# EAGLE board strum2 (EAGLE 6.6.0)
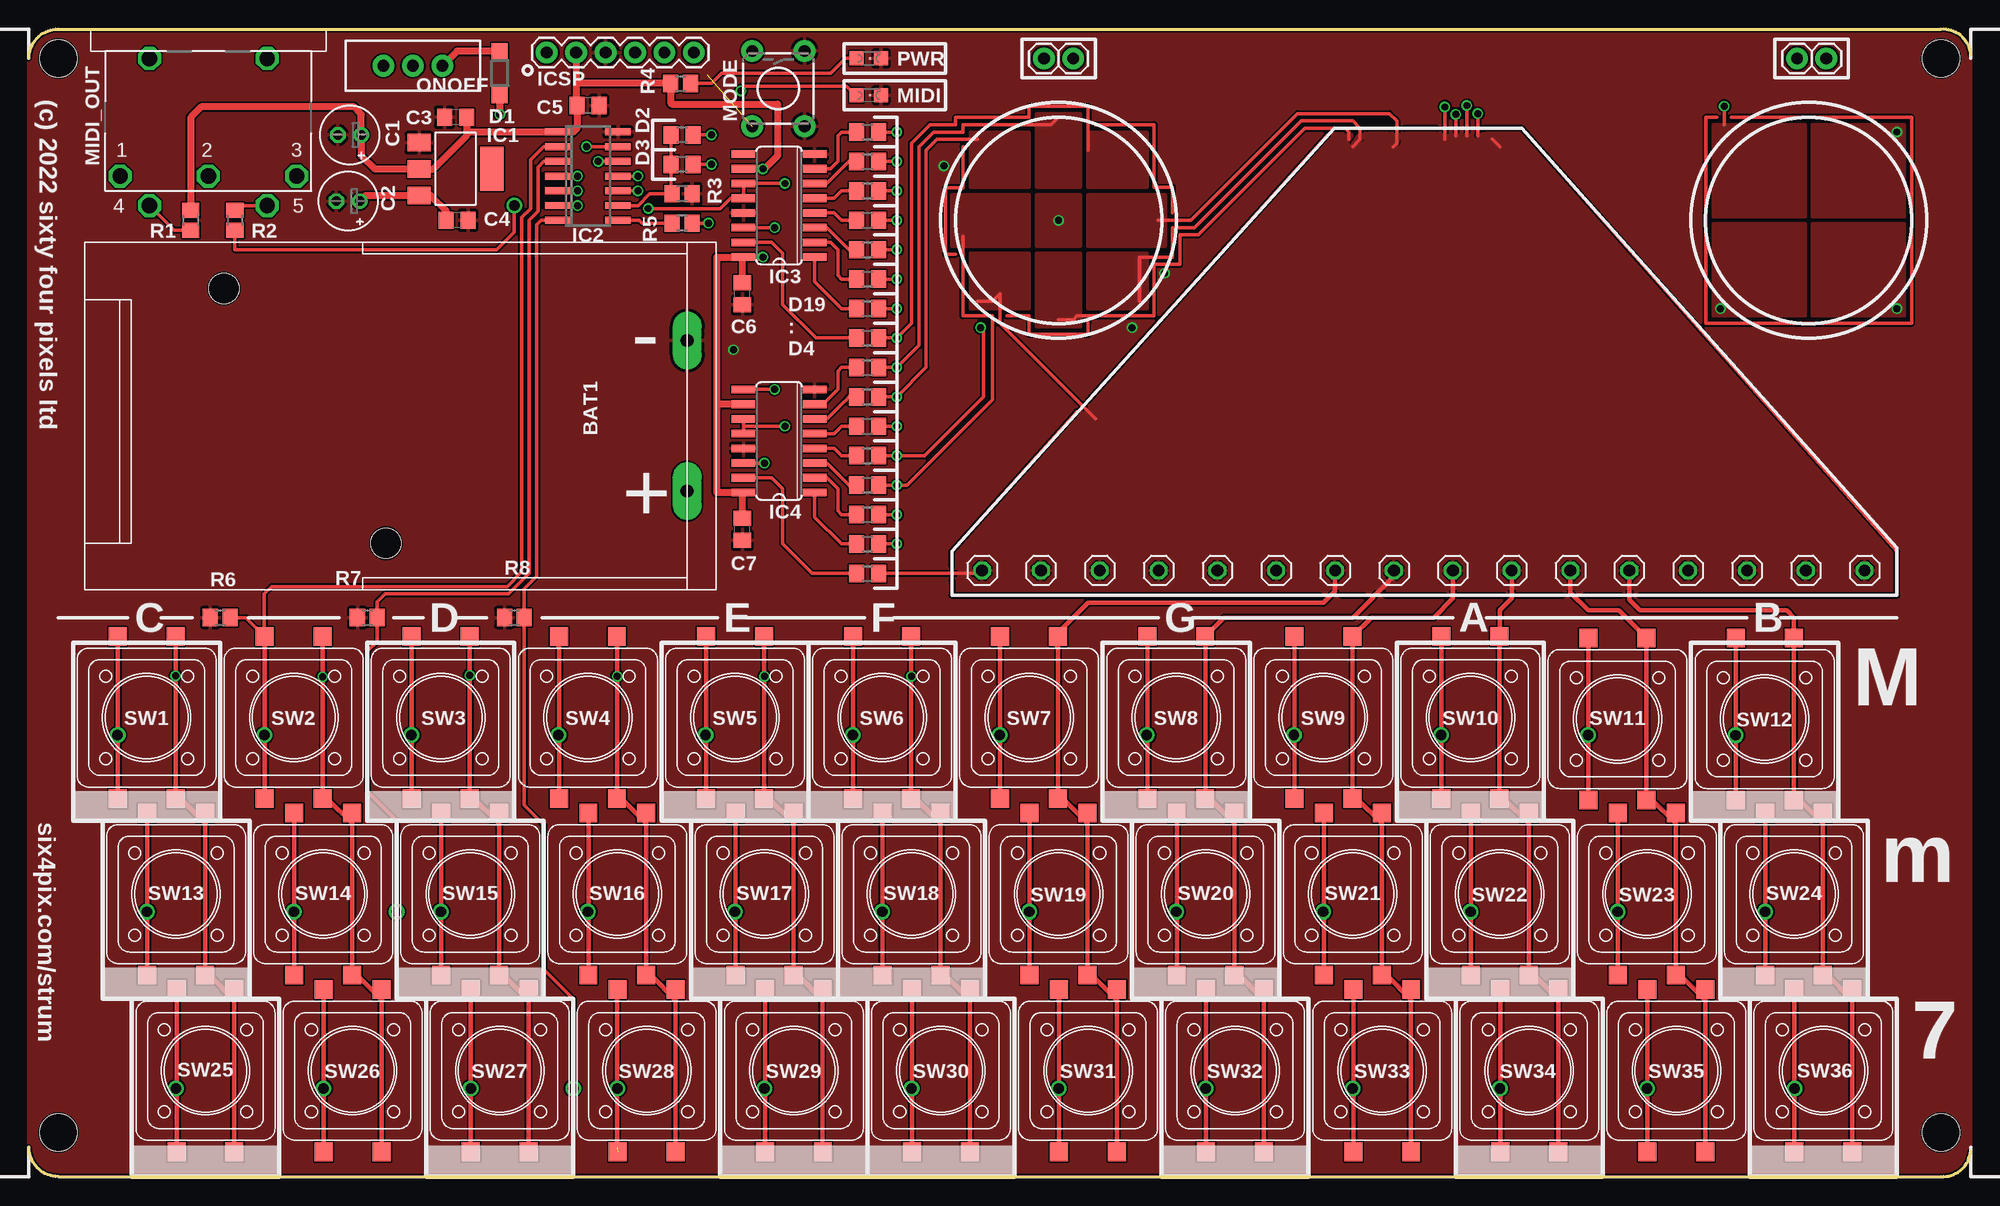
[diagram p0: board, top side]
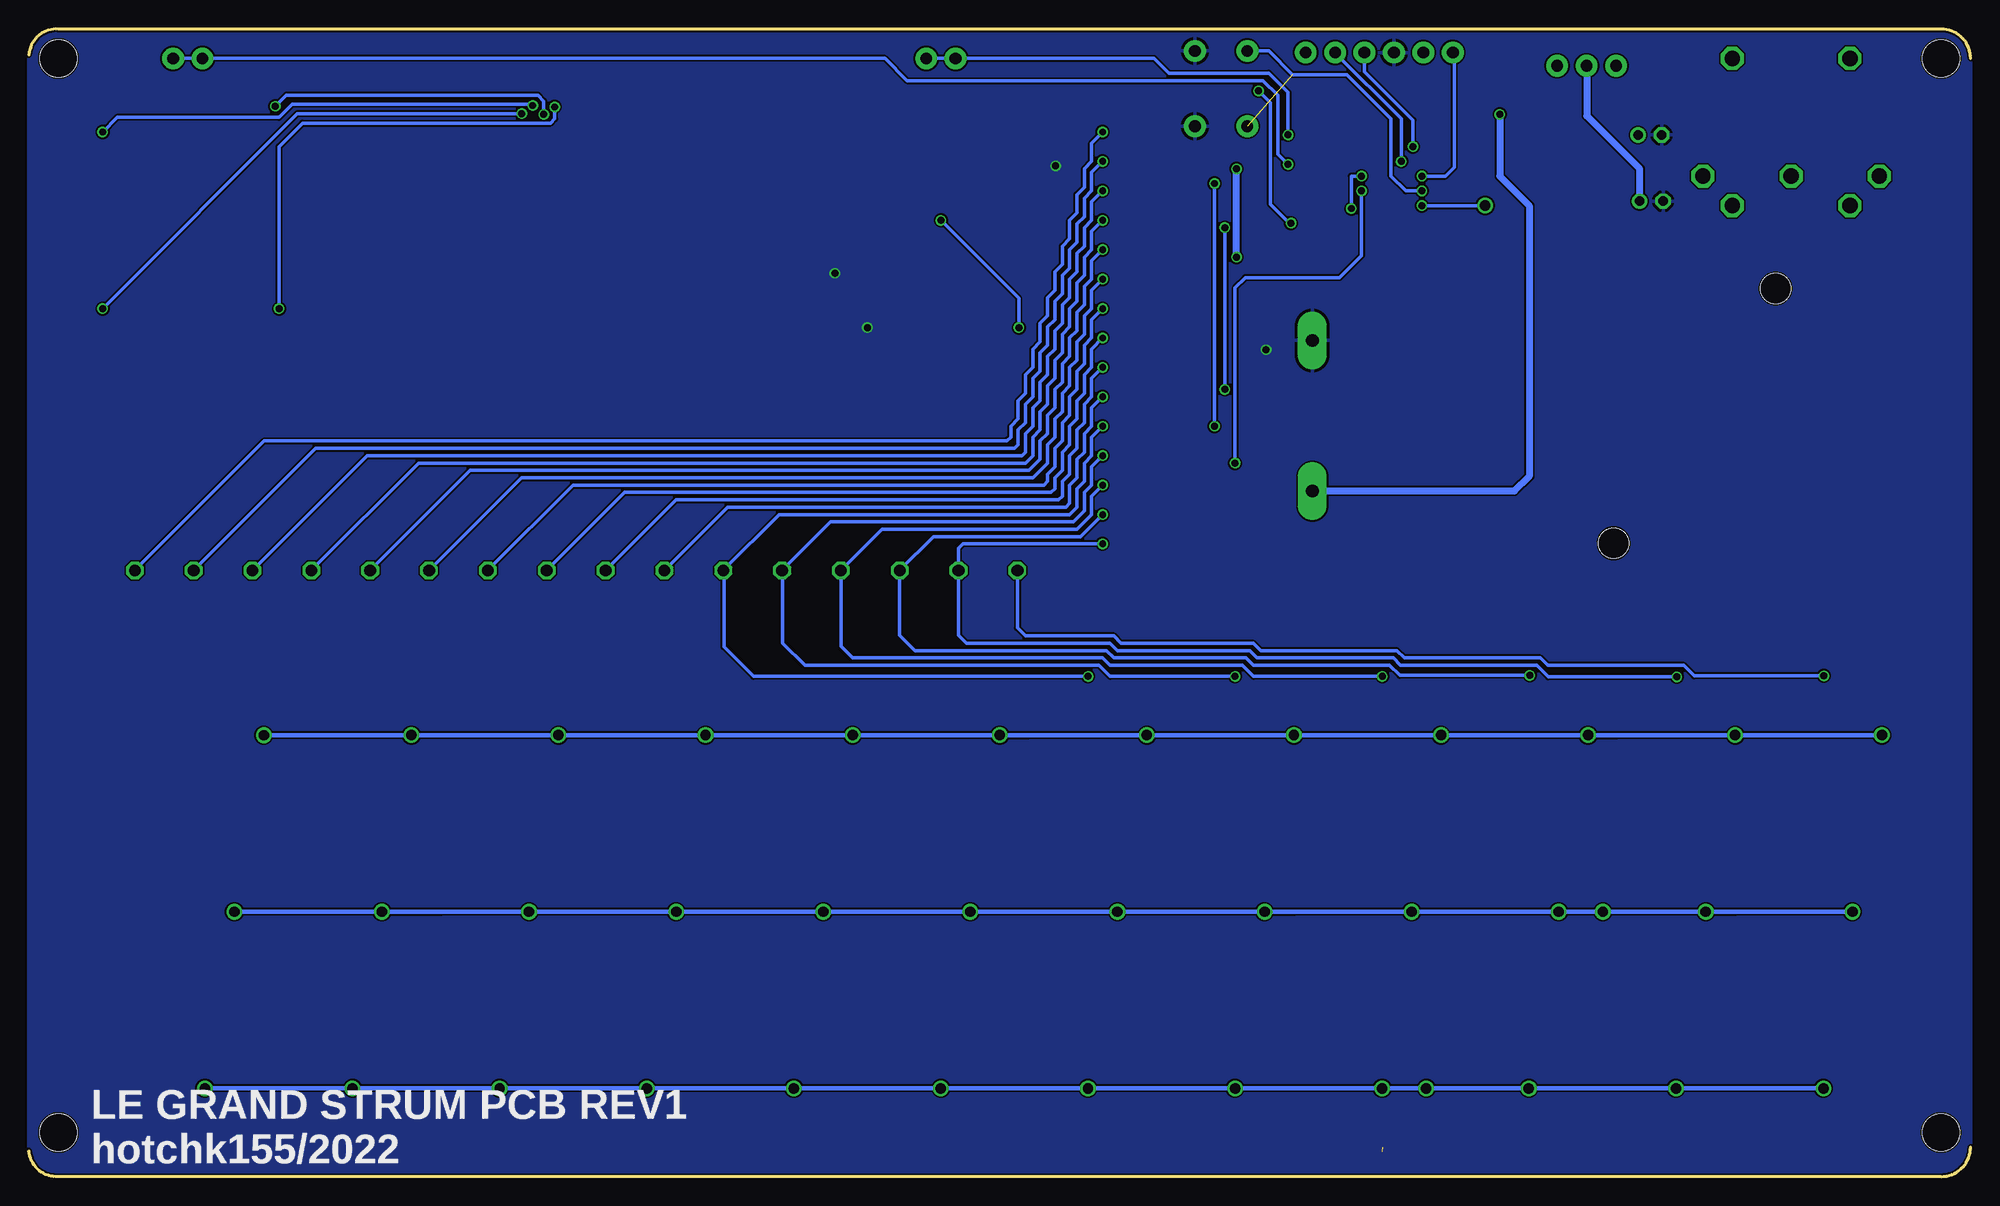
[diagram p1: board, bottom side, seen from below]

Size 167.64 x 99.07 mm. Coordinates in mm from the lower left corner, seen from the top.
Outline: 167.64,2.23 arc-90 165.1,0 2.54,0 arc-90 0,2.54
Outline: 0,96.52 arc-90 2.54,99.06 165.1,99.06 arc-90 167.64,96.84
Copper layers (1*16): Top 0.035mm / dielectric 1.5mm / Bottom 0.035mm
Design rules "hackvana": minimum track width 6mil, minimum drill 0.3mm, track to track 6mil, track to pad 9mil, pad to pad 6mil, via to via 6mil, smd to smd 0mil, copper to edge 6mil, drill to drill 6mil, minimum pad ring 10mil, minimum via ring 6mil, stop-mask expansion 2mil, vias tented up to drill 100mil, thermal gap 10mil
Holes 3.2 mm at 2.54,3.81 2.54,96.52 165.1,96.52 165.1,3.81
Holes 2.54 mm at -6.46,94 173.54,94 -6.46,4 173.54,4

## Footprints (pad centres in the part's own frame; a part is rotated, then mirrored left to right if it is on the bottom)
1X01 = drill 1.016 octagon: 1 0,0
PP3_BATTERBOX2 = drill 1.1 pad 2.5 long: 0V 52,21.5; 9V 52,8.5 | hole 2.6: 12,26; 26,4
E2-5 = drill 0.813 pad 1.27: + -1.016,0 | drill 0.813 pad 1.27 octagon: - 1.016,0
C0805 = smd 1.3 x 1.5: 1 -0.95,0; 2 0.95,0
SOD123 = smd 1.4 x 1.4: A 1.9,0; C -1.9,0
D0805 = smd 1.3 x 1.5: A -0.95,0; K 0.95,0
SOT223 = smd 1.499 x 2.007: 1 -2.261,-3.15; 2 0.025,-3.15; 3 2.311,-3.15 | smd 3.81 x 2.007: 4 0,3.15
SO14 = smd 0.6 x 2.2: 1 -3.81,-2.6; 2 -2.54,-2.6; 3 -1.27,-2.6; 4 0,-2.6; 5 1.27,-2.6; 6 2.54,-2.6; 7 3.81,-2.6; 8 3.81,2.6; 9 2.54,2.6; 10 1.27,2.6; 11 0,2.6; 12 -1.27,2.6; 13 -2.54,2.6; 14 -3.81,2.6
SO16 = smd 0.66 x 2.032: 1 -4.445,-3.073; 2 -3.175,-3.073; 3 -1.905,-3.073; 4 -0.635,-3.073; 5 0.635,-3.073; 6 1.905,-3.073; 7 3.175,-3.073; 8 4.445,-3.073; 9 4.445,3.073; 10 3.175,3.073; 11 1.905,3.073; 12 0.635,3.073; 13 -0.635,3.073; 14 -1.905,3.073; 15 -3.175,3.073; 16 -4.445,3.073
1X06 = drill 1.016 pad 1.88: 1 0,0; 2 2.54,0; 3 5.08,0; 4 7.62,0; 5 10.16,0; 6 12.7,0
CHIPLED_0805 = smd 1.2 x 1.2: A 0,-1.05; C 0,1.05
TRUCONN90 = drill 1.321 octagon: 1 7.62,5.08; 2 0,5.08; 3 -7.62,5.08; 4 5.08,7.62; 5 -5.08,7.62; NC -5.08,-5.08; NC@ 5.08,-5.08
TACTILE-PTH = drill 1.016 pad 1.88: 1 -3.251,2.261; 2 3.251,2.261; 3 -3.251,-2.261; 4 3.251,-2.261
SWITCH-SPDT = drill 1.016 pad 1.88: 1 0,2.54; 2 0,0; 3 0,-2.54
R0805 = smd 1.3 x 1.5: 1 -0.85,0; 2 0.85,0
1X01' = drill 1.016 pad 1.88: 1 0,0
12MMTACT_SMT = smd 1.6 x 1.55: A1 -7,2.5; A2 7,2.5; B1 -7,-2.5; B2 7,-2.5

## Placement (x,y rotation side)
1  [1X01]  82.3,52.33 0 top
2  [1X01]  87.38,52.33 0 top
3  [1X01]  92.46,52.33 0 top
4  [1X01]  97.54,52.33 0 top
5  [1X01]  102.62,52.33 0 top
6  [1X01]  107.7,52.33 0 top
7  [1X01]  112.78,52.33 0 top
8  [1X01]  117.86,52.33 0 top
9  [1X01]  122.94,52.33 0 top
10  [1X01]  128.02,52.33 0 top
11  [1X01]  133.1,52.33 0 top
12  [1X01]  138.18,52.33 0 top
13  [1X01]  143.26,52.33 0 top
14  [1X01]  148.34,52.33 0 top
15  [1X01]  153.42,52.33 0 top
16  [1X01]  158.5,52.33 0 top
BAT1  [PP3_BATTERBOX2]  4.83,50.68 0 top
C1  [E2-5]  27.69,89.92 180 top
C2  [E2-5]  27.56,84.21 180 top
C3  [C0805]  36.83,91.44 180 top
C4  [C0805]  36.96,82.55 180 top
C5  [C0805]  48.26,92.46 180 top
C6  [C0805]  61.59,76.2 90 top
C7  [C0805]  61.59,55.88 90 top
D1  MBR0520LT  [SOD123]  40.64,95.25 270 top
D2  [D0805]  56.39,89.92 180 top
D3  [D0805]  56.39,87.38 180 top
D4  [D0805]  72.39,52.07 0 top
D5  [D0805]  72.39,54.61 0 top
D6  [D0805]  72.39,57.15 0 top
D7  [D0805]  72.39,59.69 0 top
D8  [D0805]  72.39,62.23 0 top
D9  [D0805]  72.39,64.77 0 top
D10  [D0805]  72.39,67.31 0 top
D11  [D0805]  72.39,69.85 0 top
D12  [D0805]  72.39,72.39 0 top
D13  [D0805]  72.39,74.93 0 top
D14  [D0805]  72.39,77.47 0 top
D15  [D0805]  72.39,80.01 0 top
D16  [D0805]  72.39,82.55 0 top
D17  [D0805]  72.39,85.09 0 top
D18  [D0805]  72.39,87.63 0 top
D19  [D0805]  72.39,90.17 0 top
IC1  REG1117  [SOT223]  36.83,87 270 top
IC2  PIC16F1825SO14  [SO14]  48.26,86.37 270 top
IC3  74HC595D  [SO16]  64.77,83.82 90 top
IC4  74HC595D  [SO16]  64.77,63.5 90 top
ICSP  [1X06]  44.7,97.03 0 top
MIDI  [CHIPLED_0805]  72.52,93.35 270 top
MIDI_OUT  DIN5PIN"  [TRUCONN90]  15.49,91.44 180 top
MODE  [TACTILE-PTH]  64.71,93.92 270 top
ONOFF  [SWITCH-SPDT]  33.15,95.89 270 top
PWR  [CHIPLED_0805]  72.52,96.52 270 top
R1  220r  [R0805]  13.97,82.55 270 top
R2  220r  [R0805]  17.78,82.55 270 top
R3  10k  [R0805]  56.39,84.84 180 top
R4  1k  [R0805]  56.26,94.37 0 top
R5  1k  [R0805]  56.39,82.3 180 top
R6  10k  [R0805]  16.51,48.26 0 top
R7  10k  [R0805]  29.21,48.26 0 top
R8  10k  [R0805]  41.91,48.26 0 top
STYLUS  M01PTH  [1X01']  152.65,96.52 0 top
STYLUS1  M01PTH  [1X01']  155.19,96.52 0 top
STYLUS2  M01PTH  [1X01']  90.17,96.52 0 top
STYLUS3  M01PTH  [1X01']  87.63,96.52 0 top
SW1  12MMTACT_SMT  [12MMTACT_SMT]  10.16,39.63 90 top
SW2  12MMTACT_SMT  [12MMTACT_SMT]  22.86,39.63 90 top
SW3  12MMTACT_SMT  [12MMTACT_SMT]  35.56,39.63 90 top
SW4  12MMTACT_SMT  [12MMTACT_SMT]  48.26,39.63 90 top
SW5  12MMTACT_SMT  [12MMTACT_SMT]  60.96,39.63 90 top
SW6  12MMTACT_SMT  [12MMTACT_SMT]  73.66,39.63 90 top
SW7  12MMTACT_SMT  [12MMTACT_SMT]  86.36,39.63 90 top
SW8  12MMTACT_SMT  [12MMTACT_SMT]  99.06,39.63 90 top
SW9  12MMTACT_SMT  [12MMTACT_SMT]  111.76,39.63 90 top
SW10  12MMTACT_SMT  [12MMTACT_SMT]  124.46,39.63 90 top
SW11  12MMTACT_SMT  [12MMTACT_SMT]  137.16,39.5 90 top
SW12  12MMTACT_SMT  [12MMTACT_SMT]  149.86,39.5 90 top
SW13  12MMTACT_SMT  [12MMTACT_SMT]  12.7,24.39 90 top
SW14  12MMTACT_SMT  [12MMTACT_SMT]  25.4,24.39 90 top
SW15  12MMTACT_SMT  [12MMTACT_SMT]  38.1,24.39 90 top
SW16  12MMTACT_SMT  [12MMTACT_SMT]  50.8,24.39 90 top
SW17  12MMTACT_SMT  [12MMTACT_SMT]  63.5,24.39 90 top
SW18  12MMTACT_SMT  [12MMTACT_SMT]  76.2,24.39 90 top
SW19  12MMTACT_SMT  [12MMTACT_SMT]  88.9,24.39 90 top
SW20  12MMTACT_SMT  [12MMTACT_SMT]  101.6,24.39 90 top
SW21  12MMTACT_SMT  [12MMTACT_SMT]  114.3,24.39 90 top
SW22  12MMTACT_SMT  [12MMTACT_SMT]  127,24.39 90 top
SW23  12MMTACT_SMT  [12MMTACT_SMT]  139.7,24.39 90 top
SW24  12MMTACT_SMT  [12MMTACT_SMT]  152.4,24.39 90 top
SW25  12MMTACT_SMT  [12MMTACT_SMT]  15.24,9.15 90 top
SW26  12MMTACT_SMT  [12MMTACT_SMT]  27.94,9.15 90 top
SW27  12MMTACT_SMT  [12MMTACT_SMT]  40.64,9.15 90 top
SW28  12MMTACT_SMT  [12MMTACT_SMT]  53.34,9.15 90 top
SW29  12MMTACT_SMT  [12MMTACT_SMT]  66.04,9.15 90 top
SW30  12MMTACT_SMT  [12MMTACT_SMT]  78.74,9.15 90 top
SW31  12MMTACT_SMT  [12MMTACT_SMT]  91.44,9.15 90 top
SW32  12MMTACT_SMT  [12MMTACT_SMT]  104.14,9.15 90 top
SW33  12MMTACT_SMT  [12MMTACT_SMT]  116.84,9.15 90 top
SW34  12MMTACT_SMT  [12MMTACT_SMT]  129.54,9.15 90 top
SW35  12MMTACT_SMT  [12MMTACT_SMT]  142.24,9.15 90 top
SW36  12MMTACT_SMT  [12MMTACT_SMT]  154.94,9.15 90 top

## Library data of the parts
1-16 = pinhead
BAT1 IC2 MIDI_OUT = jasons_stuff
C1-C7 = rcl
D1 = diode
D2-D19 SW1-SW36 = jason_eagle6
IC1 = burr-brown; MPN: REG1117; OC_FARNELL: 1097566; OC_NEWARK: 14P6981
IC3 IC4 = 74xx-eu
ICSP MODE ONOFF STYLUS STYLUS1-STYLUS3 = SparkFun
MIDI PWR = led
R1-R8 = resistor

## Nets
CARRY: IC3.14 IC4.9
GND: BAT1.0V C1.- C2.- C3.2 C4.1 C5.1 C6.1 C7.1 IC1.1 IC2.14 IC3.8 IC3.13 IC4.8 IC4.13 ICSP.3 MIDI.C MODE.1 MODE.2 PWR.C R3.1 R6.1 R7.1 R8.1
LINE1: 1.1 D4.K SW1.B1 SW1.B2 SW13.B1 SW13.B2 SW25.B1 SW25.B2
LINE2: 2.1 D5.K SW2.B1 SW2.B2 SW14.B1 SW14.B2 SW26.B1 SW26.B2
LINE3: 3.1 D6.K SW3.B1 SW3.B2 SW15.B1 SW15.B2 SW27.B1 SW27.B2
LINE4: 4.1 D7.K SW4.B1 SW4.B2 SW16.B1 SW16.B2 SW28.B1 SW28.B2
LINE5: 5.1 D8.K SW5.B1 SW5.B2 SW17.B1 SW17.B2 SW29.B1 SW29.B2
LINE6: 6.1 D9.K SW6.B1 SW6.B2 SW18.B1 SW18.B2 SW30.B1 SW30.B2
LINE7: 7.1 D10.K SW7.B1 SW7.B2 SW19.B1 SW19.B2 SW31.B1 SW31.B2
LINE8: 8.1 D11.K SW8.B1 SW8.B2 SW20.B1 SW20.B2 SW32.B1 SW32.B2
LINE9: 9.1 D12.K SW9.B1 SW9.B2 SW21.B1 SW21.B2 SW33.B1 SW33.B2
LINE10: 10.1 D13.K SW10.B1 SW10.B2 SW22.B1 SW22.B2 SW34.B1 SW34.B2
LINE11: 11.1 D14.K SW11.B1 SW11.B2 SW23.B1 SW23.B2 SW35.B1 SW35.B2
LINE12: 12.1 D15.K SW12.B1 SW12.B2 SW24.B1 SW24.B2 SW36.B1 SW36.B2
LINE13: 13.1 D16.K
LINE14: 14.1 D17.K
LINE15: 15.1 D18.K
LINE16: 16.1 D19.K
N$1: PWR.A R4.2
N$2: BAT1.9V D1.A
N$3: D1.C ONOFF.1
N$5: D4.A IC4.15
N$6: D5.A IC4.1
N$7: D6.A IC4.2
N$8: D7.A IC4.3
N$9: D8.A IC4.4
N$10: D9.A IC4.5
N$11: D10.A IC4.6
N$12: MIDI.A R5.1
N$13: D11.A IC4.7
N$14: D12.A IC3.15
N$15: D13.A IC3.1
N$16: D14.A IC3.2
N$17: D15.A IC3.3
N$18: D16.A IC3.4
N$19: D17.A IC3.5
N$20: D18.A IC3.6
N$21: D19.A IC3.7
N$24: D2.A STYLUS2.1 STYLUS3.1
N$25: D3.A STYLUS1.1 STYLUS.1
N$44: MIDI_OUT.5 R2.1
N$48: MIDI_OUT.4 R1.2
N$59: C2.+ C4.2 IC1.3 ONOFF.2
RA0: IC2.13 ICSP.4
RA1: IC2.12 ICSP.5
RA2: IC2.11 IC3.11 IC3.12 IC4.11 IC4.12
RA3: IC2.4 ICSP.1
RA4: IC2.3 R7.2 SW13.A1 SW13.A2 SW14.A1 SW14.A2 SW15.A1 SW15.A2 SW16.A1 SW16.A2 SW17.A1 SW17.A2 SW18.A1 SW18.A2 SW19.A1 SW19.A2 SW20.A1 SW20.A2 SW21.A1 SW21.A2 SW22.A1 SW22.A2 SW23.A1 SW23.A2 SW24.A1 SW24.A2
RA5: IC2.2 R6.2 SW1.A1 SW1.A2 SW2.A1 SW2.A2 SW3.A1 SW3.A2 SW4.A1 SW4.A2 SW5.A1 SW5.A2 SW6.A1 SW6.A2 SW7.A1 SW7.A2 SW8.A1 SW8.A2 SW9.A1 SW9.A2 SW10.A1 SW10.A2 SW11.A1 SW11.A2 SW12.A1 SW12.A2
RC0: IC2.10 IC4.14
RC1: D2.K D3.K IC2.9 R3.2
RC2: IC2.8 R5.2
RC3: IC2.7 R8.2 SW25.A1 SW25.A2 SW26.A1 SW26.A2 SW27.A1 SW27.A2 SW28.A1 SW28.A2 SW29.A1 SW29.A2 SW30.A1 SW30.A2 SW31.A1 SW31.A2 SW32.A1 SW32.A2 SW33.A1 SW33.A2 SW34.A1 SW34.A2 SW35.A1 SW35.A2 SW36.A1 SW36.A2
RC4: IC2.6 R2.2
RC5: IC2.5 MODE.3 MODE.4
VCC: C1.+ C3.1 C5.2 C6.2 C7.2 IC1.2 IC2.1 IC3.10 IC3.16 IC4.10 IC4.16 ICSP.2 R1.1 R4.1

## Tracks (layer width: path | path; a pad name or v marks a point on that pad's centre or on a via)
CARRY  (via drill 0.6)
  Top 0.305: IC3.14 v64.39,81.92 | v64.39,67.95 IC4.9
  Bottom 0.305: v64.39,81.92 v64.39,67.95
GND  (via drill 0.6)
  other vias: 95.25,73.28 98.04,77.98 60.83,71.38 78.99,87.25
  pour Top: 0,99.06 0,0 167.64,0 167.64,99.06
  pour Bottom: 0,99.06 0,0 167.64,0 167.64,99.06
LINE1  (via drill 0.6)
  Top 0.305: D4.K 82.04,52.07 1.1 | 81.92,75.57 83.19,75.57 83.82,76.2 83.82,73.66 92.08,65.41
  Top 0.406: SW25.B1 17.74,15.24 | 17.74,15.24 SW25.B2 | SW1.B2 v12.66,43.22 SW1.B1 13.1,32.63 15.2,30.52 | 17.74,15.24 15.6,17.39 SW13.B1 SW13.B2 15.2,30.52 | 15.2,30.52 15.24,30.48
  Bottom 0.305: v12.66,43.22 23.85,43.22 24.77,44.14 36.51,44.14 37.15,44.77 48.89,44.77 49.53,45.41 61.28,45.41 61.91,46.04 73.34,46.04 73.98,46.68 81.6,46.68 82.3,47.38 1.1
  pour Top: 80.26,53.85 80.26,50.8 84.33,50.8 84.33,53.85 113.28,89.92 112.78,89.92
  pour Top: 81.28,79.7 86.36,79.7 86.36,74.93 81.28,74.93
LINE2  (via drill 0.6)
  Top 0.305: D5.K v74.93,54.61 | 113.98,89.54 113.98,90.17 113.67,90.49 110.17,90.49 100.97,81.28 99.38,81.28 99.38,78.74 97.16,78.74 97.16,74.3 90.49,74.3 90.17,73.98 88.9,73.98
  Top 0.406: SW26.B1 30.44,15.2 30.48,15.24 | 30.48,15.24 30.48,16.11 SW26.B2 | SW14.B2 27.9,30.48 | 27.9,30.48 SW14.B1 28.34,17.39 30.48,15.24 | SW2.B2 v25.36,43.14 SW2.B1 25.76,32.63 27.9,30.48
  Bottom 0.305: v74.93,54.61 87,54.61 87.38,54.23 2.1 87.38,46.74 86.68,46.04 74.3,46.04 73.66,45.41 62.23,45.41 61.59,44.77 49.85,44.77 49.21,44.14 37.46,44.14 36.47,43.14 v25.36,43.14
  pour Top: 85.34,53.85 85.34,50.8 89.41,50.8 89.41,53.85 114.3,89.92 113.79,89.92
  pour Top: 87,79.7 90.81,79.7 90.81,73.35 87,73.35
LINE3  (via drill 0.6)
  Top 0.305: D6.K v74.93,57.15 | 114.3,88.9 114.94,89.54 114.94,90.49 114.3,91.13 109.86,91.13 100.65,81.92 98.74,81.92 98.74,79.38 95.89,79.38 95.89,75.57
  Top 0.406: SW27.B1 43.14,15.24 | 43.14,15.24 SW27.B2 | SW15.B2 40.6,30.48 | 40.6,30.48 SW15.B1 41,17.39 43.14,15.24 | SW3.B2 v38.06,43.26 SW3.B1 38.46,32.63 40.6,30.48
  Bottom 0.305: v74.93,57.15 76.84,55.25 89.54,55.25 3.1 92.46,46.74 91.12,45.41 74.61,45.41 73.98,44.77 62.55,44.77 61.91,44.14 50.16,44.14 49.29,43.26 v38.06,43.26
  pour Top: 90.42,53.85 90.42,50.8 94.49,50.8 94.49,53.85 115.32,89.92 114.81,89.92
  pour Top: 91.44,79.7 91.44,74.93 96.52,74.93 96.52,79.7
LINE4  (via drill 0.6)
  Top 0.305: D7.K v74.93,59.69 75.82,59.69 83.19,67.06 83.19,74.3 80.65,74.3 80.65,81.16 | SW4.B2 50.76,43.22 v50.8,43.18
  Top 0.406: SW28.B1 55.84,15.24 | 55.84,15.24 SW28.B2 | SW16.B2 53.3,30.48 | 53.3,30.48 SW16.B1 53.7,17.39 55.84,15.24 | SW4.B2 SW4.B1 51.16,32.63 53.3,30.48
  Bottom 0.305: v74.93,59.69 75.88,58.74 75.88,57.15 77.15,55.88 93.98,55.88 4.1 97.54,45.79 96.52,44.77 74.93,44.77 74.3,44.14 62.87,44.14 61.91,43.18 v50.8,43.18
  pour Top: 95.5,53.85 95.5,50.8 99.57,50.8 99.57,53.85 116.33,89.92 115.82,89.92
  pour Top: 86.36,80.33 86.36,84.78 79.69,84.78 79.69,80.33
LINE5  (via drill 0.6)
  Top 0.305: D8.K v74.93,62.23 77.34,62.23 82.42,67.31 82.42,73.03 v82.17,73.28 | SW5.B2 63.46,43.22 v63.5,43.18
  Top 0.406: SW29.B1 68.54,15.24 | 68.54,15.24 SW29.B2 | SW17.B2 66,30.48 | 66,30.48 SW17.B1 66.4,17.39 68.54,15.24 | SW5.B2 SW5.B1 63.9,32.63 66.04,30.48 66,30.48
  Bottom 0.305: v74.93,62.23 75.88,61.28 75.88,59.69 76.52,59.06 76.52,57.47 77.47,56.52 98.43,56.52 5.1 102.55,52.27 102.55,46.04 100.65,44.14 75.25,44.14 74.3,43.18 v63.5,43.18 | v82.17,73.28 82.17,75.82 v88.9,82.55
  pour Top: 100.58,53.85 100.58,50.8 104.65,50.8 104.65,53.85 117.35,89.92 116.84,89.92
  pour Top: 87,84.78 87,80.33 90.81,80.33 90.81,84.78
LINE6  (via drill 0.6)
  Top 0.305: D9.K v74.93,64.77 | 97.47,82.55 100.33,82.55 109.54,91.76 117.48,91.76 118.11,91.13 118.11,89.22 117.79,88.9 | SW6.B2 76.16,43.22 v76.2,43.18
  Top 0.406: SW30.B1 81.24,15.24 | 81.24,15.24 SW30.B2 | SW18.B2 78.7,30.48 | 78.7,30.48 SW18.B1 79.1,17.39 81.24,15.24 | SW6.B2 SW6.B1 76.56,32.63 78.7,30.48
  Bottom 0.305: v74.93,64.77 75.88,63.82 75.88,62.23 76.52,61.6 76.52,60.01 77.15,59.38 77.15,57.79 77.79,57.15 102.87,57.15 6.1 107.63,52.27 107.63,45.72 105.09,43.18 v76.2,43.18
  pour Top: 105.66,53.85 105.66,50.8 109.73,50.8 109.73,53.85 118.36,89.92 117.86,89.92
  pour Top: 91.44,84.78 91.44,80.33 98.11,80.33 98.11,84.78
LINE7  (via drill 0.6)
  Top 0.305: D10.K v74.93,67.31 77.47,69.85 77.47,88.59 78.42,89.54 81.92,89.54
  Top 0.406: SW31.B1 93.94,15.24 | 93.94,15.24 SW31.B2 | SW19.B2 91.4,30.48 | 91.4,30.48 SW19.B1 91.8,17.39 93.94,15.24 | SW7.B2 88.86,45.72 | 88.86,45.72 88.86,33.06 88.9,33.02 88.9,32.67 | 88.9,32.67 SW7.B1 | 88.9,32.67 89.22,32.67 91.4,30.48 | 7.1 112.78,50.55 111.76,49.53 91.44,49.53 88.27,46.36 88.27,46.32 88.86,45.72
  Bottom 0.305: 7.1 107.32,57.79 78.11,57.79 77.79,58.11 77.79,59.69 77.15,60.33 77.15,61.92 76.52,62.55 76.52,64.14 75.88,64.77 75.88,66.36 v74.93,67.31
  pour Top: 110.74,53.85 110.74,50.8 114.81,50.8 114.81,53.85 119.38,89.92 118.87,89.92
  pour Top: 86.36,85.41 81.28,85.41 81.28,90.17 86.36,90.17
LINE8  (via drill 0.6)
  Top 0.305: D11.K v74.93,69.85 76.84,71.76 76.84,88.9 78.11,90.17 80.65,90.17 80.65,90.81 88.27,90.81 88.9,91.44
  Top 0.406: SW32.B1 106.64,15.24 | 106.64,15.24 SW32.B2 | SW20.B2 104.1,30.48 | 104.1,30.48 104.1,17.82 104.14,17.78 104.14,17.43 | 104.14,17.43 SW20.B1 | 104.1,30.48 101.96,32.63 SW8.B1 SW8.B2 103.2,48.26 114.3,48.26 117.86,51.82 8.1 | 104.14,17.43 104.46,17.43 106.64,15.24
  Bottom 0.305: 8.1 111.76,58.42 78.74,58.42 78.42,58.74 78.42,60.01 77.79,60.65 77.79,62.23 77.15,62.87 77.15,64.46 76.52,65.09 76.52,66.68 75.88,67.31 75.88,68.9 v74.93,69.85
  pour Top: 115.82,53.85 115.82,50.8 119.89,50.8 119.89,53.85 120.4,89.92 119.89,89.92
  pour Top: 87,85.41 90.81,85.41 90.81,91.76 87,91.76
LINE9  (via drill 0.6)
  Top 0.305: D12.K v74.93,72.39 76.2,73.66 76.2,89.22 77.79,90.81 80.01,90.81 80.01,91.44 86.36,91.44 86.36,92.4 91.44,92.4 91.44,88.59
  Top 0.406: SW33.B1 SW33.B2 119.34,15.28 | SW21.B2 116.8,30.48 | 116.8,30.48 SW21.B1 117.24,17.39 119.34,15.28 | 114.26,45.72 SW9.B2 115.9,48.26 121.29,48.26 122.94,49.92 9.1 | 114.26,45.72 SW9.B1 114.66,32.63 116.8,30.48 | 114.3,45.76 114.26,45.72 | 119.34,15.28 119.38,15.24
  Bottom 0.305: 9.1 116.21,59.06 79.38,59.06 79.06,59.38 79.06,60.33 78.42,60.96 78.42,62.55 77.79,63.19 77.79,64.77 77.15,65.41 77.15,67 76.52,67.63 76.52,69.22 75.88,69.85 75.88,71.44 v74.93,72.39
  pour Top: 120.9,53.85 120.9,50.8 124.97,50.8 124.97,53.85 121.41,89.92 120.9,89.92
  pour Top: 91.44,85.41 91.44,90.17 96.52,90.17 96.52,85.41
LINE10  (via drill 0.6)
  Top 0.305: D13.K v74.93,74.93 | v122.24,92.33 122.24,89.54
  Top 0.406: SW34.B1 SW34.B2 132.04,15.28 | SW22.B2 129.5,30.48 | 129.5,30.48 129.5,17.82 129.54,17.78 129.54,17.43 | 129.54,17.43 SW22.B1 | SW10.B2 126.96,45.72 | 126.96,45.72 SW10.B1 127.36,32.63 129.5,30.48 | 129.54,17.43 129.9,17.43 132.04,15.28 | 10.1 128.02,49.92 127,48.9 127,45.76 126.96,45.72 | 132.04,15.28 132.08,15.24
  Bottom 0.305: 10.1 120.65,59.69 80.01,59.69 79.69,60.01 79.69,60.65 79.06,61.28 79.06,62.87 78.42,63.5 78.42,65.09 77.79,65.73 77.79,67.31 77.15,67.95 77.15,69.54 76.52,70.17 76.52,71.76 75.88,72.39 75.88,73.98 v74.93,74.93 | v146.05,74.93 146.05,88.9 144.02,90.94 122.62,90.94 122.24,91.32 v122.24,92.33
  pour Top: 125.98,53.85 125.98,50.8 130.05,50.8 130.05,53.85 122.43,89.92 121.92,89.92
  pour Top: 145.41,82.24 153.35,82.24 153.35,74.3 145.41,74.3
LINE11  (via drill 0.6)
  Top 0.305: D14.K v74.93,77.47 | v123.19,91.7 123.19,89.86 | v146.37,92.4 146.37,90.81
  Top 0.406: SW35.B1 144.74,15.24 | 144.74,15.24 SW35.B2 | SW23.B2 142.2,30.48 | 142.2,30.48 142.2,17.82 142.24,17.78 142.24,17.43 | 142.24,17.43 SW23.B1 | 142.2,30.48 140.18,32.5 SW11.B1 SW11.B2 137.26,48.9 134.62,48.9 133.1,50.42 11.1 | 142.24,17.43 142.56,17.43 144.74,15.24
  Bottom 0.305: 11.1 125.1,60.33 80.96,60.33 79.69,61.6 79.69,63.19 79.06,63.82 79.06,65.41 78.42,66.04 78.42,67.63 77.79,68.27 77.79,69.85 77.15,70.49 77.15,72.08 76.52,72.71 76.52,74.3 75.88,74.93 75.88,76.52 v74.93,77.47 | v123.19,91.7 123.19,92.84 123.7,93.35 145.41,93.35 v146.37,92.4
  pour Top: 131.06,53.85 131.06,50.8 135.13,50.8 135.13,53.85 123.44,89.92 122.94,89.92
  pour Top: 145.41,82.87 153.35,82.87 153.35,90.81 145.41,90.81
LINE12  (via drill 0.6)
  Top 0.305: D15.K v74.93,80.01 | v124.14,92.46 124.14,89.86
  Top 0.406: SW36.B1 157.44,15.24 | 157.44,15.24 SW36.B2 | SW24.B2 154.9,30.48 | 154.9,30.48 SW24.B1 155.3,17.39 157.44,15.24 | SW12.B2 152.36,45.72 | 152.36,45.72 SW12.B1 152.88,32.5 154.9,30.48 | 12.1 138.18,49.79 139.06,48.9 151.76,48.9 152.4,48.26 152.4,45.76 152.36,45.72
  Bottom 0.305: 12.1 129.54,60.96 81.28,60.96 80.33,61.92 80.33,63.5 79.69,64.14 79.69,65.73 79.06,66.36 79.06,67.95 78.42,68.58 78.42,70.17 77.79,70.81 77.79,72.39 77.15,73.03 77.15,74.62 76.52,75.25 76.52,76.84 75.88,77.47 75.88,79.06 v74.93,80.01 | v161.29,90.17 160.02,91.44 146.05,91.44 144.91,92.59 124.21,92.59 124.14,92.52 v124.14,92.46
  pour Top: 136.14,53.85 136.14,50.8 140.21,50.8 140.21,53.85 124.46,89.92 123.95,89.92
  pour Top: 153.99,82.87 153.99,90.81 161.92,90.81 161.92,82.87
LINE13  (via drill 0.6)
  Top 0.305: D16.K v74.93,82.55 | v125.1,91.76 125.1,89.86
  Bottom 0.305: 13.1 133.98,61.6 81.6,61.6 80.96,62.23 80.96,63.82 80.33,64.46 80.33,66.04 79.69,66.68 79.69,68.27 79.06,68.9 79.06,70.49 78.42,71.12 78.42,72.71 77.79,73.35 77.79,74.93 77.15,75.57 77.15,77.16 76.52,77.79 76.52,79.38 75.88,80.01 75.88,81.6 v74.93,82.55 | v161.29,74.93 144.46,91.76 v125.1,91.76
  pour Top: 141.22,53.85 141.22,50.8 145.29,50.8 145.29,53.85 125.48,89.92 124.97,89.92
  pour Top: 153.99,82.24 153.99,74.3 161.92,74.3 161.92,82.24
LINE14  (via drill 0.6)
  Top 0.305: D17.K v74.93,85.09 | 126.37,89.54 127,88.9
  Bottom 0.305: 14.1 138.43,62.23 81.92,62.23 81.6,62.55 81.6,64.14 80.96,64.77 80.96,66.36 80.33,67 80.33,68.58 79.69,69.22 79.69,70.81 79.06,71.44 79.06,73.03 78.42,73.66 78.42,75.25 77.79,75.89 77.79,77.47 77.15,78.11 77.15,79.7 76.52,80.33 76.52,81.92 75.88,82.55 75.88,84.14 v74.93,85.09
  pour Top: 146.3,53.85 146.3,50.8 150.37,50.8 150.37,53.85 126.49,89.92 125.98,89.92
LINE15  (via drill 0.6)
  Top 0.305: D18.K v74.93,87.63
  Bottom 0.305: 15.1 142.88,62.87 82.55,62.87 82.23,63.19 82.23,64.46 81.6,65.09 81.6,66.68 80.96,67.31 80.96,68.9 80.33,69.54 80.33,71.12 79.69,71.76 79.69,73.35 79.06,73.98 79.06,75.57 78.42,76.2 78.42,77.79 77.79,78.43 77.79,80.01 77.15,80.65 77.15,82.24 76.52,82.87 76.52,84.46 75.88,85.09 75.88,86.68 v74.93,87.63
  pour Top: 151.38,53.85 151.38,50.8 155.45,50.8 155.45,53.85 127.51,89.92 127,89.92
LINE16  (via drill 0.6)
  Top 0.305: D19.K v74.93,90.17
  Bottom 0.305: 16.1 147.32,63.5 83.19,63.5 82.87,63.82 82.87,64.77 82.23,65.41 82.23,67 81.6,67.63 81.6,69.22 80.96,69.85 80.96,71.44 80.33,72.08 80.33,73.66 79.69,74.3 79.69,75.89 79.06,76.52 79.06,78.11 78.42,78.74 78.42,80.33 77.79,80.97 77.79,82.55 77.15,83.19 77.15,84.78 76.52,85.41 76.52,87 75.88,87.63 75.88,89.22 v74.93,90.17
  pour Top: 156.46,53.85 156.46,50.8 160.53,50.8 160.53,53.85 128.52,89.92 128.02,89.92
N$1
  Top 0.305: PWR.A 70.48,96.52 69.22,95.25 59.82,95.25 58.93,94.37 R4.2
N$2  (via drill 0.6)
  Top 0.61: D1.A v40.64,91.7
  Bottom 0.61: BAT1.9V 56.82,59.19 39.37,59.19 38.1,60.46 38.1,83.82 40.64,86.36 v40.64,91.7
N$3
  Top 0.61: D1.C 36.95,97.15 ONOFF.1
N$5
  Top 0.305: IC4.15 64.14,60.33 65.09,59.38 65.09,54.61 67.63,52.07 D4.A
N$6
  Top 0.305: IC4.1 67.84,56.94 70.17,54.61 D5.A
N$7
  Top 0.305: IC4.2 68.9,60.33 69.85,59.38 69.85,57.47 70.17,57.15 D6.A
N$8
  Top 0.305: IC4.3 68.9,61.6 70.8,59.69 D7.A
N$9
  Top 0.305: IC4.4 69.53,62.87 70.17,62.23 D8.A
N$10
  Top 0.305: IC4.5 69.53,64.14 70.17,64.77 D9.A
N$11
  Top 0.305: IC4.6 68.9,65.41 70.33,66.84 70.48,67 70.8,67.31 D10.A
N$12  (via drill 0.6)
  Top 0.305: 71.25,93.35 MIDI.A 71.37,93.35 70.61,94.11 61.85,94.11 v61.47,93.73 | R5.1 v58.67,82.3
  Bottom 0.305: v58.67,82.3 58.67,82.17 60.45,83.95 60.45,92.71 v61.47,93.73
N$13
  Top 0.305: D11.A 70.17,69.85 69.85,69.54 69.85,67.95 68.58,66.68 IC4.7
N$14
  Top 0.305: IC3.15 64.14,80.65 65.09,79.7 65.09,75.25 67.95,72.39 D12.A
N$15
  Top 0.305: IC3.1 67.84,77.26 70.17,74.93 D13.A
N$16
  Top 0.305: IC3.2 69.22,80.65 69.85,80.01 69.85,77.79 70.17,77.47 D14.A
N$17
  Top 0.305: D15.A 70.8,80.01 68.9,81.92 IC3.3
N$18
  Top 0.305: D16.A 70.17,82.55 69.53,83.19 IC3.4
N$19
  Top 0.305: IC3.5 69.53,84.46 70.17,85.09 D17.A
N$20
  Top 0.305: IC3.6 68.9,85.73 70.8,87.63 D18.A
N$21
  Top 0.305: IC3.7 69.22,87 69.85,87.63 69.85,89.86 70.17,90.17 D19.A
N$22
  Top 0.305: 80.65,88.9 80.65,85.35 79.12,85.35 79.12,79.63 80.01,79.63
N$23
  Top 0.305: 84.46,74.3 86.36,74.3 86.36,72.71 91.44,72.71 91.44,73.73
N$24  (via drill 0.6)
  Top 0.305: D2.A v58.93,89.92
  Bottom 0.305: v58.93,89.92 58.93,93.6 60.58,95.25 69.22,95.25 70.48,96.52 STYLUS3.1 STYLUS2.1
N$25  (via drill 0.6)
  Top 0.305: D3.A v58.93,87.38
  Bottom 0.305: STYLUS1.1 STYLUS.1 93.73,96.52 91.82,94.62 61.09,94.62 59.82,93.35 59.82,88.27 v58.93,87.38
N$26
  Top 0.305: 92.08,90.81 97.16,90.81 97.16,85.41 98.74,85.41 98.74,83.19
N$27
  Top 0.305: 145.73,91.44 144.78,91.44 144.78,73.66 162.56,73.66 162.56,91.44 147,91.44
N$28
  Top 0.305: 79.69,51.44 79.69,50.17 111.44,50.17
N$29
  Top 0.305: 113.35,50.17 115.25,50.17
N$30
  Top 0.305: 117.16,50.17 122.24,50.17
N$31
  Top 0.305: 123.51,50.17 127.32,50.17
N$32
  Top 0.305: 128.59,50.17 132.4,50.17
N$33
  Top 0.305: 134.3,50.17 137.48,50.17
N$34
  Top 0.305: 139.06,50.17 161.29,50.17 161.29,53.98 128.91,90.49 125.67,90.49
N$35
  Top 0.305: 121.6,90.49 118.75,90.49
N$36
  Top 0.305: 117.48,90.49 115.57,90.49
N$37
  Top 0.305: 79.69,52.71 79.69,53.98 90.49,66.04
N$38
  Top 0.305: 91.44,67 112.08,89.86
N$44
  Top 0.305: MIDI_OUT.5 18.2,83.82 R2.1
N$48
  Top 0.305: R1.2 12.53,81.7 MIDI_OUT.4
N$59
  Top 0.61: C4.2 36.01,83.38 34.7,84.69 IC1.3 29.06,84.69 C2.+
  Bottom 0.61: C2.+ 28.57,87 33.15,91.57 ONOFF.2
RA0  (via drill 0.6)
  Top 0.305: IC2.13 v48.14,88.91 v48.13,88.9
  Bottom 0.305: ICSP.4 52.32,95.38 48.13,91.19 v48.13,88.9
RA1  (via drill 0.6)
  Top 0.305: IC2.12 v49.15,87.64 v49.15,87.63
  Bottom 0.305: v49.15,87.63 49.15,91.32 ICSP.5
RA2  (via drill 0.6)
  Top 0.305: v65.28,85.73 IC3.11 IC3.12 60.58,84.46 59.69,83.57 v53.47,83.57 | IC4.11 61.7,64.77 | 61.7,64.77 IC4.12 | v65.28,64.77 61.7,64.77 | IC2.11 v52.57,86.37 v52.58,86.36
  Bottom 0.305: v52.58,86.36 53.47,86.36 v53.47,83.57 | v65.28,85.73 v65.28,64.77
RA3  (via drill 0.6)
  Top 0.305: IC2.4 v47.37,86.37 v47.37,86.36
  Bottom 0.305: v47.37,86.36 45.34,86.36 44.58,87.13 44.58,96.91 ICSP.1
RA4  (via drill 0.9)
  Top 0.305: v31.75,22.87 31.75,30.74 29.21,33.28 29.21,45.34 30.06,46.19 R7.2 30.06,49.62 30.73,50.3 41.4,50.3 43.18,52.07 43.18,82.55 43.94,83.32 43.94,87.13 44.45,87.63 IC2.3
  Top 0.406: SW13.A2 v10.2,22.87 10.2,17.82 10.16,17.78 10.16,17.43 SW13.A1 | SW14.A2 22.9,22.91 | 22.9,22.91 22.9,17.82 22.86,17.78 22.86,17.43 SW14.A1 | SW15.A2 35.6,22.91 | 35.6,22.91 SW15.A1 | SW16.A2 48.3,22.91 | 48.3,22.91 SW16.A1 | SW17.A2 61,22.91 | 61,22.91 SW17.A1 | SW19.A2 86.4,22.91 | 86.4,22.91 SW19.A1 | SW20.A2 99.1,22.91 | 99.1,22.91 SW20.A1 | SW21.A2 111.8,22.91 | 111.8,22.91 SW21.A1 | SW22.A2 124.5,22.91 | 124.5,22.91 124.5,17.82 124.46,17.78 124.46,17.43 SW22.A1 | SW23.A2 137.2,22.91 | 137.2,22.91 SW23.A1 | SW24.A2 v149.9,22.86 SW24.A1 | SW18.A1 73.7,22.91 | 73.7,22.91 73.7,30.44 73.66,30.48 73.66,31.35 SW18.A2 | 137.2,22.91 v137.16,22.87 | 124.5,22.91 v124.46,22.87 | 111.8,22.91 v111.76,22.87 | 99.1,22.91 v99.06,22.87 | 86.4,22.91 v86.36,22.87 | 73.7,22.91 v73.66,22.87 | 61,22.91 v60.96,22.87 | 48.3,22.91 v48.26,22.87 | 35.6,22.91 v35.56,22.87 | 22.9,22.91 v22.86,22.87
  Bottom 0.305: v31.75,22.87 30.48,22.87 30.48,22.86
  Bottom 0.406: v10.2,22.87 v22.86,22.87 | v22.86,22.87 v31.75,22.87 v35.56,22.87 v48.26,22.87 v60.96,22.87 | v60.96,22.87 v73.66,22.87 | v73.66,22.87 v86.36,22.87 v99.06,22.87 v111.76,22.87 v124.46,22.87 v137.16,22.87 | v137.16,22.87 v149.9,22.87 v149.9,22.86 | v137.16,22.87 132.08,22.87 132.08,22.86 | v73.66,22.87 v73.66,22.86 | v60.96,22.87 58.42,22.87 58.42,22.86 | v22.86,22.87 20.32,22.87 20.32,22.86
RA5  (via drill 0.9)
  Top 0.305: R6.2 18.72,48.26 SW2.A2 | 20.36,45.72 20.32,45.76 20.32,50.3 20.95,50.93 41.27,50.93 42.55,52.2 42.55,82.81 43.31,83.57 43.31,87.76 44.45,88.9 IC2.2
  Top 0.406: SW1.A2 v7.66,38.11 7.66,33.06 7.62,33.02 7.62,32.67 SW1.A1 | SW2.A2 20.36,45.72 20.36,38.15 | 20.36,38.15 SW2.A1 | SW3.A2 33.06,38.15 | 33.06,38.15 SW3.A1 | SW4.A2 45.76,45.72 | 45.76,45.72 45.76,38.15 | 45.76,38.15 SW4.A1 | SW5.A2 58.46,38.15 | 58.46,38.15 SW5.A1 | SW6.A2 71.16,38.15 | 71.16,38.15 71.16,33.06 71.12,33.02 71.12,32.67 SW6.A1 | SW7.A2 83.86,38.15 | 83.86,38.15 SW7.A1 | SW8.A2 96.56,38.15 | 96.56,38.15 SW8.A1 | SW9.A2 109.26,38.15 | 109.26,38.15 SW9.A1 | SW10.A2 121.96,38.15 | 121.96,38.15 121.96,33.06 121.92,33.02 121.92,32.67 SW10.A1 | SW11.A2 134.66,38.15 | 134.66,38.15 SW11.A1 | SW12.A2 v147.36,38.1 SW12.A1 | 134.66,38.15 v134.62,38.11 | 121.96,38.15 v121.92,38.11 | 109.26,38.15 v109.22,38.11 | 96.56,38.15 v96.52,38.11 | 83.86,38.15 v83.82,38.11 | 71.16,38.15 v71.12,38.11 | 58.46,38.15 v58.42,38.11 | 45.76,38.15 v45.72,38.11 | 33.06,38.15 v33.02,38.11 | 20.36,38.15 v20.32,38.11 | 45.72,45.76 45.76,45.72
  Bottom 0.406: v7.66,38.11 v20.32,38.11 v33.02,38.11 | v33.02,38.11 v45.72,38.11 v58.42,38.11 v71.12,38.11 v83.82,38.11 | v83.82,38.11 v96.52,38.11 v109.22,38.11 v121.92,38.11 v134.62,38.11 v147.35,38.11 v147.36,38.1 | v83.82,38.11 81.29,38.11 81.28,38.1 | v33.02,38.11 30.49,38.11 30.48,38.1
RC0  (via drill 0.6)
  Top 0.305: IC2.10 v52.57,85.1 v52.58,85.09 | IC4.14 v63.5,61.6
  Bottom 0.305: v52.58,85.09 52.58,79.51 54.48,77.6 62.61,77.6 63.5,76.71 v63.5,61.6
RC1
  Top 0.305: IC2.9 52.58,83.82 53.59,84.84 R3.2 55.44,84.94 D3.K D2.K
RC2
  Top 0.305: IC2.8 52.7,82.56 52.96,82.3 R5.2
RC3  (via drill 0.9)  (1 unrouted)
  Top 0.305: 12.74,5.12 v12.7,7.62 | v46.99,7.62 46.99,15.37 44.45,17.91 44.45,30.36 42.85,31.95 arc-45 42.76,32.18 R8.2 42.76,50.77 43.81,51.82 43.81,82.17 44.2,82.56 IC2.7
  Top 0.406: SW25.A2 12.74,5.12 SW25.A1 | SW26.A2 v25.44,7.62 SW26.A1 | SW27.A2 v38.14,7.62 SW27.A1 | SW29.A2 63.54,7.58 | 63.54,7.58 SW29.A1 63.54,5.04 | SW30.A2 76.24,5.12 | 76.24,5.12 SW30.A1 | SW31.A2 88.94,5.12 | 88.94,5.12 SW31.A1 | SW32.A2 101.64,5.12 | 101.64,5.12 SW32.A1 | SW33.A2 114.34,5.12 | 114.34,5.12 SW33.A1 | SW34.A2 127.04,5.12 | 127.04,5.12 SW34.A1 | SW35.A2 139.74,5.12 | 139.74,5.12 SW35.A1 | SW36.A2 v152.44,7.62 SW36.A1 | 50.8,2.54 v50.8,7.62 50.8,16.11 SW28.A2 | 63.54,7.58 v63.5,7.62 | 139.74,5.12 v139.7,7.62 | 127.04,5.12 v127,7.62 | 114.34,5.12 v114.3,7.62 | 101.64,5.12 v101.6,7.62 | 88.94,5.12 v88.9,7.62 | 76.24,5.12 v76.2,7.62
  Bottom 0.406: v12.7,7.62 v25.44,7.62 v38.14,7.62 v46.99,7.62 v50.8,7.62 v63.5,7.62 v76.2,7.62 v88.9,7.62 v101.6,7.62 v114.3,7.62 v127,7.62 v139.7,7.62 v152.44,7.62
RC4  (via drill 0.6, 0.9)
  Top 0.305: IC2.6 v47.37,83.83 v47.37,83.82 | R2.2 17.78,80.01 40.39,80.01 41.91,81.54 v41.91,83.82
  Bottom 0.305: v47.37,83.82 v41.91,83.82
RC5  (via drill 0.6)  (1 unrouted)
  Top 0.305: IC2.5 v47.37,85.1 v47.37,85.09
  Bottom 0.305: v47.37,85.09 48.77,85.09 50.04,86.36 50.04,91.32 53.85,95.13 58.55,95.13 60.59,97.17 MODE.3
VCC  (via drill 0.6)
  Top 0.61: 37.78,90.17 C3.1 37.91,91.32 | 37.78,90.17 37.78,89.85 34.9,86.97 IC1.2 29.87,86.97 28.7,88.14 C1.+ 28.7,91.7 28.07,92.33 14.86,92.33 13.97,91.44 R1.1 | ICSP.2 47.24,94.37 | 47.24,94.37 47.24,92.53 C5.2 47.31,90.49 46.99,90.17 IC2.1 37.78,90.17 | C6.2 61.59,79.28 IC3.16 | C7.2 61.59,58.96 IC4.16 59.37,59.06 59.37,66.68 | IC3.16 59.37,79.38 59.37,66.68 | IC4.10 59.37,66.68 | 47.24,94.37 R4.1 55.41,92.68 55.5,92.59 64.64,92.59 64.64,88.14 63.5,87 v63.37,87 IC3.10 | IC3.16 v63.37,79.38
  Bottom 0.61: v63.37,79.38 v63.37,87

## Text on the board
tPlace: (c) 2022 sixty four pixels ltd | D19 / : / D4 | C | D | E | F | G | A | B | M | six4pix.com/strum | m | 7
bPlace: LE GRAND STRUM PCB REV1 / hotchk155/2022